# Altium PCB Sensor.PcbDoc (part 2 of 3)
Units mil, origin at the board's own origin, x right, y up, seen from the top; angles counter-clockwise.
Board outline 4000 x 3000 mil, 2 copper layers (Top Layer, Bottom Layer); 1202 components, 71 nets, 2560 pads, 0 vias.
Unrouted connection lines stored in the file: 2489.
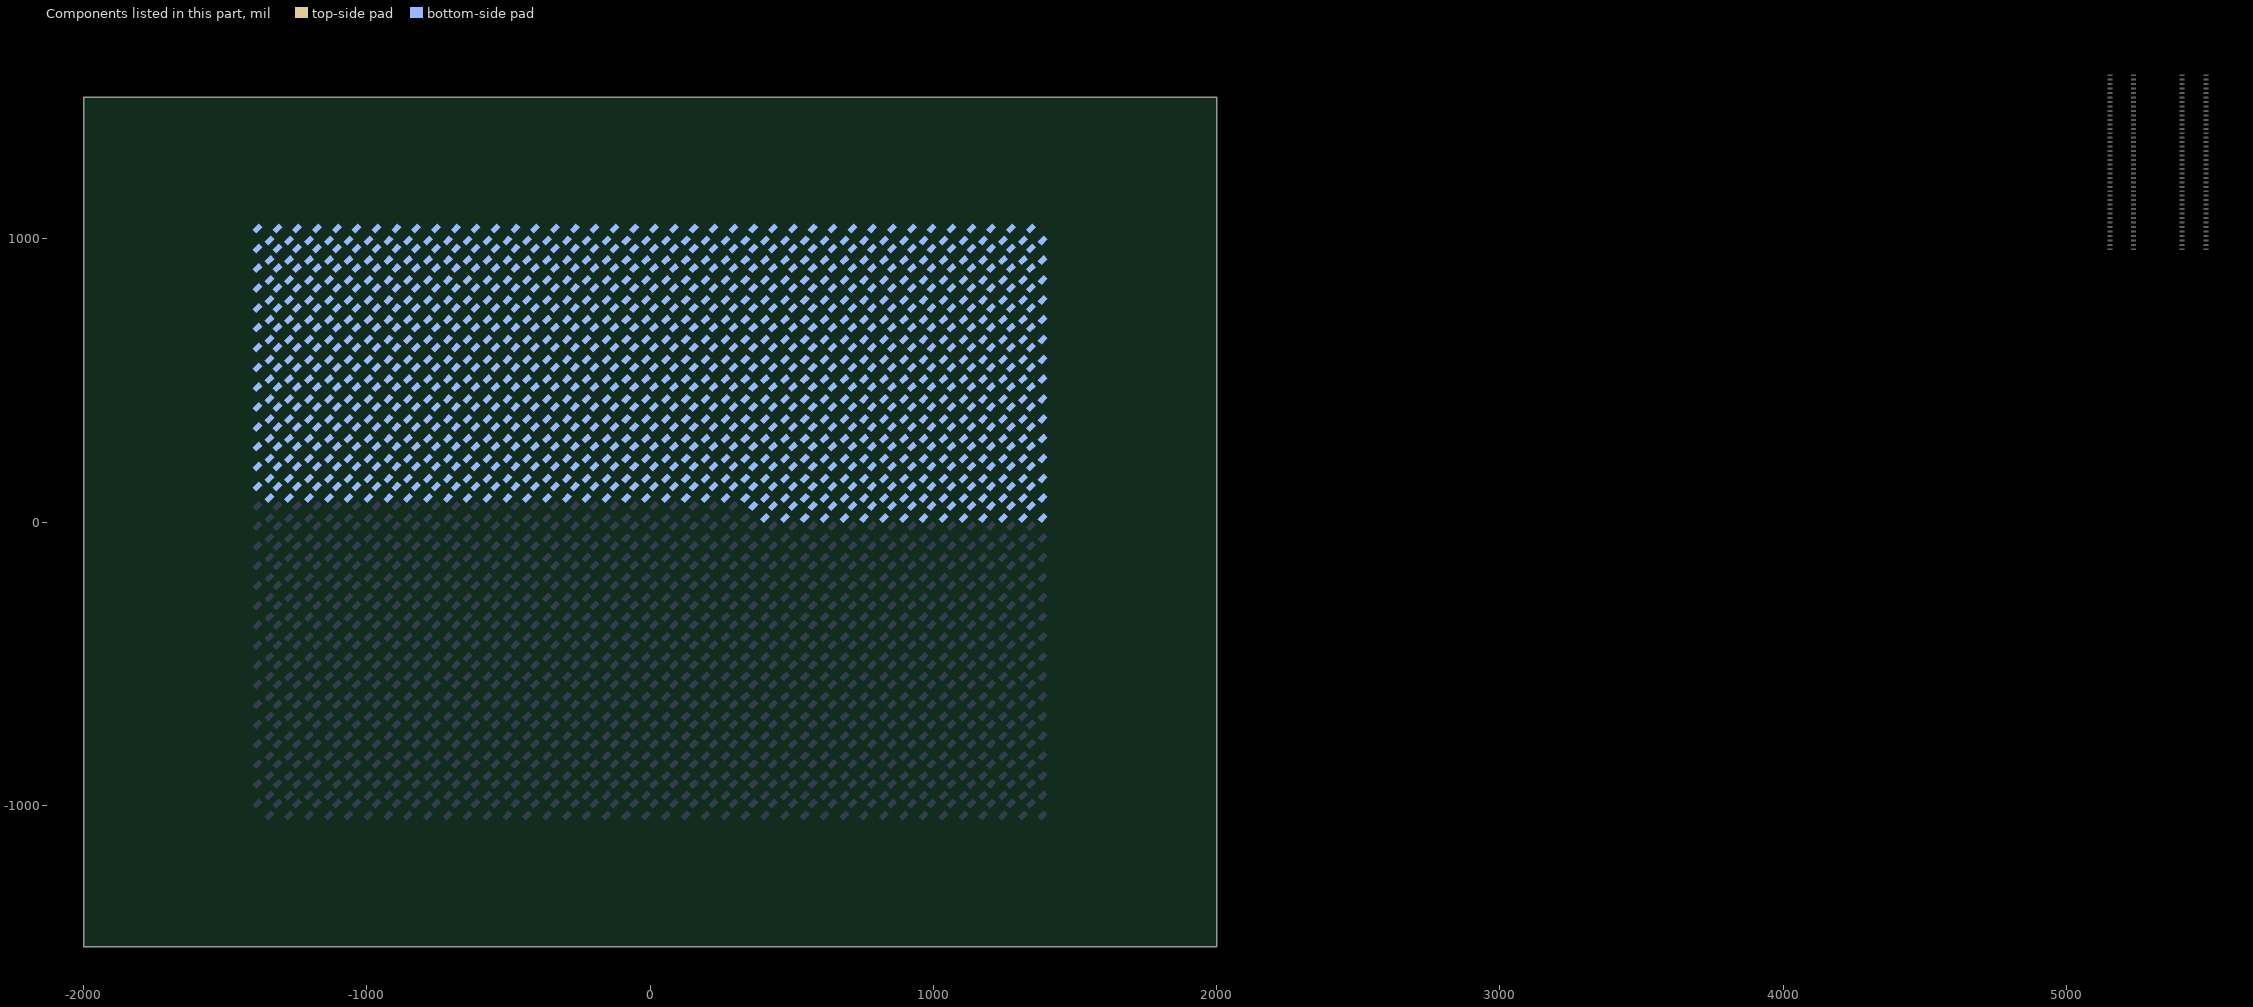
[diagram p2: the components of this part, seen from the top]

## Components (designator, comment, footprint, x,y, rotation, side; value= is the part's Value field where it differs from the comment) (continued)
Q626 "B19H1LS--H9C000114U1930" B19H1LS--H9C000114U1930 385,35 r135 bottom
Q627 "B19H1LS--H9C000114U1930" B19H1LS--H9C000114U1930 455,35 r135 bottom
Q628 "B19H1LS--H9C000114U1930" B19H1LS--H9C000114U1930 525,35 r135 bottom
Q629 "B19H1LS--H9C000114U1930" B19H1LS--H9C000114U1930 595,35 r135 bottom
Q630 "B19H1LS--H9C000114U1930" B19H1LS--H9C000114U1930 665,35 r135 bottom
Q631 "B19H1LS--H9C000114U1930" B19H1LS--H9C000114U1930 735,35 r135 bottom
Q632 "B19H1LS--H9C000114U1930" B19H1LS--H9C000114U1930 805,35 r135 bottom
Q633 "B19H1LS--H9C000114U1930" B19H1LS--H9C000114U1930 875,35 r135 bottom
Q634 "B19H1LS--H9C000114U1930" B19H1LS--H9C000114U1930 945,35 r135 bottom
Q635 "B19H1LS--H9C000114U1930" B19H1LS--H9C000114U1930 1015,35 r135 bottom
Q636 "B19H1LS--H9C000114U1930" B19H1LS--H9C000114U1930 1085,35 r135 bottom
Q637 "B19H1LS--H9C000114U1930" B19H1LS--H9C000114U1930 1155,35 r135 bottom
Q638 "B19H1LS--H9C000114U1930" B19H1LS--H9C000114U1930 1225,35 r135 bottom
Q639 "B19H1LS--H9C000114U1930" B19H1LS--H9C000114U1930 1295,35 r135 bottom
Q640 "B19H1LS--H9C000114U1930" B19H1LS--H9C000114U1930 1365,35 r135 bottom
Q641 "B19H1LS--H9C000114U1930" B19H1LS--H9C000114U1930 -1365,105 r135 bottom
Q642 "B19H1LS--H9C000114U1930" B19H1LS--H9C000114U1930 -1295,105 r135 bottom
Q643 "B19H1LS--H9C000114U1930" B19H1LS--H9C000114U1930 -1225,105 r135 bottom
Q644 "B19H1LS--H9C000114U1930" B19H1LS--H9C000114U1930 -1155,105 r135 bottom
Q645 "B19H1LS--H9C000114U1930" B19H1LS--H9C000114U1930 -1085,105 r135 bottom
Q646 "B19H1LS--H9C000114U1930" B19H1LS--H9C000114U1930 -1015,105 r135 bottom
Q647 "B19H1LS--H9C000114U1930" B19H1LS--H9C000114U1930 -945,105 r135 bottom
Q648 "B19H1LS--H9C000114U1930" B19H1LS--H9C000114U1930 -875,105 r135 bottom
Q649 "B19H1LS--H9C000114U1930" B19H1LS--H9C000114U1930 -805,105 r135 bottom
Q650 "B19H1LS--H9C000114U1930" B19H1LS--H9C000114U1930 -735,105 r135 bottom
Q651 "B19H1LS--H9C000114U1930" B19H1LS--H9C000114U1930 -665,105 r135 bottom
Q652 "B19H1LS--H9C000114U1930" B19H1LS--H9C000114U1930 -595,105 r135 bottom
Q653 "B19H1LS--H9C000114U1930" B19H1LS--H9C000114U1930 -525,105 r135 bottom
Q654 "B19H1LS--H9C000114U1930" B19H1LS--H9C000114U1930 -455,105 r135 bottom
Q655 "B19H1LS--H9C000114U1930" B19H1LS--H9C000114U1930 -385,105 r135 bottom
Q656 "B19H1LS--H9C000114U1930" B19H1LS--H9C000114U1930 -315,105 r135 bottom
Q657 "B19H1LS--H9C000114U1930" B19H1LS--H9C000114U1930 -245,105 r135 bottom
Q658 "B19H1LS--H9C000114U1930" B19H1LS--H9C000114U1930 -175,105 r135 bottom
Q659 "B19H1LS--H9C000114U1930" B19H1LS--H9C000114U1930 -105,105 r135 bottom
Q660 "B19H1LS--H9C000114U1930" B19H1LS--H9C000114U1930 -35,105 r135 bottom
Q661 "B19H1LS--H9C000114U1930" B19H1LS--H9C000114U1930 35,105 r135 bottom
Q662 "B19H1LS--H9C000114U1930" B19H1LS--H9C000114U1930 105,105 r135 bottom
Q663 "B19H1LS--H9C000114U1930" B19H1LS--H9C000114U1930 175,105 r135 bottom
Q664 "B19H1LS--H9C000114U1930" B19H1LS--H9C000114U1930 245,105 r135 bottom
Q665 "B19H1LS--H9C000114U1930" B19H1LS--H9C000114U1930 315,105 r135 bottom
Q666 "B19H1LS--H9C000114U1930" B19H1LS--H9C000114U1930 385,105 r135 bottom
Q667 "B19H1LS--H9C000114U1930" B19H1LS--H9C000114U1930 455,105 r135 bottom
Q668 "B19H1LS--H9C000114U1930" B19H1LS--H9C000114U1930 525,105 r135 bottom
Q669 "B19H1LS--H9C000114U1930" B19H1LS--H9C000114U1930 595,105 r135 bottom
Q670 "B19H1LS--H9C000114U1930" B19H1LS--H9C000114U1930 665,105 r135 bottom
Q671 "B19H1LS--H9C000114U1930" B19H1LS--H9C000114U1930 735,105 r135 bottom
Q672 "B19H1LS--H9C000114U1930" B19H1LS--H9C000114U1930 805,105 r135 bottom
Q673 "B19H1LS--H9C000114U1930" B19H1LS--H9C000114U1930 875,105 r135 bottom
Q674 "B19H1LS--H9C000114U1930" B19H1LS--H9C000114U1930 945,105 r135 bottom
Q675 "B19H1LS--H9C000114U1930" B19H1LS--H9C000114U1930 1015,105 r135 bottom
Q676 "B19H1LS--H9C000114U1930" B19H1LS--H9C000114U1930 1085,105 r135 bottom
Q677 "B19H1LS--H9C000114U1930" B19H1LS--H9C000114U1930 1155,105 r135 bottom
Q678 "B19H1LS--H9C000114U1930" B19H1LS--H9C000114U1930 1225,105 r135 bottom
Q679 "B19H1LS--H9C000114U1930" B19H1LS--H9C000114U1930 1295,105 r135 bottom
Q680 "B19H1LS--H9C000114U1930" B19H1LS--H9C000114U1930 1365,105 r135 bottom
Q681 "B19H1LS--H9C000114U1930" B19H1LS--H9C000114U1930 -1365,175 r135 bottom
Q682 "B19H1LS--H9C000114U1930" B19H1LS--H9C000114U1930 -1295,175 r135 bottom
Q683 "B19H1LS--H9C000114U1930" B19H1LS--H9C000114U1930 -1225,175 r135 bottom
Q684 "B19H1LS--H9C000114U1930" B19H1LS--H9C000114U1930 -1155,175 r135 bottom
Q685 "B19H1LS--H9C000114U1930" B19H1LS--H9C000114U1930 -1085,175 r135 bottom
Q686 "B19H1LS--H9C000114U1930" B19H1LS--H9C000114U1930 -1015,175 r135 bottom
Q687 "B19H1LS--H9C000114U1930" B19H1LS--H9C000114U1930 -945,175 r135 bottom
Q688 "B19H1LS--H9C000114U1930" B19H1LS--H9C000114U1930 -875,175 r135 bottom
Q689 "B19H1LS--H9C000114U1930" B19H1LS--H9C000114U1930 -805,175 r135 bottom
Q690 "B19H1LS--H9C000114U1930" B19H1LS--H9C000114U1930 -735,175 r135 bottom
Q691 "B19H1LS--H9C000114U1930" B19H1LS--H9C000114U1930 -665,175 r135 bottom
Q692 "B19H1LS--H9C000114U1930" B19H1LS--H9C000114U1930 -595,175 r135 bottom
Q693 "B19H1LS--H9C000114U1930" B19H1LS--H9C000114U1930 -525,175 r135 bottom
Q694 "B19H1LS--H9C000114U1930" B19H1LS--H9C000114U1930 -455,175 r135 bottom
Q695 "B19H1LS--H9C000114U1930" B19H1LS--H9C000114U1930 -385,175 r135 bottom
Q696 "B19H1LS--H9C000114U1930" B19H1LS--H9C000114U1930 -315,175 r135 bottom
Q697 "B19H1LS--H9C000114U1930" B19H1LS--H9C000114U1930 -245,175 r135 bottom
Q698 "B19H1LS--H9C000114U1930" B19H1LS--H9C000114U1930 -175,175 r135 bottom
Q699 "B19H1LS--H9C000114U1930" B19H1LS--H9C000114U1930 -105,175 r135 bottom
Q700 "B19H1LS--H9C000114U1930" B19H1LS--H9C000114U1930 -35,175 r135 bottom
Q701 "B19H1LS--H9C000114U1930" B19H1LS--H9C000114U1930 35,175 r135 bottom
Q702 "B19H1LS--H9C000114U1930" B19H1LS--H9C000114U1930 105,175 r135 bottom
Q703 "B19H1LS--H9C000114U1930" B19H1LS--H9C000114U1930 175,175 r135 bottom
Q704 "B19H1LS--H9C000114U1930" B19H1LS--H9C000114U1930 245,175 r135 bottom
Q705 "B19H1LS--H9C000114U1930" B19H1LS--H9C000114U1930 315,175 r135 bottom
Q706 "B19H1LS--H9C000114U1930" B19H1LS--H9C000114U1930 385,175 r135 bottom
Q707 "B19H1LS--H9C000114U1930" B19H1LS--H9C000114U1930 455,175 r135 bottom
Q708 "B19H1LS--H9C000114U1930" B19H1LS--H9C000114U1930 525,175 r135 bottom
Q709 "B19H1LS--H9C000114U1930" B19H1LS--H9C000114U1930 595,175 r135 bottom
Q710 "B19H1LS--H9C000114U1930" B19H1LS--H9C000114U1930 665,175 r135 bottom
Q711 "B19H1LS--H9C000114U1930" B19H1LS--H9C000114U1930 735,175 r135 bottom
Q712 "B19H1LS--H9C000114U1930" B19H1LS--H9C000114U1930 805,175 r135 bottom
Q713 "B19H1LS--H9C000114U1930" B19H1LS--H9C000114U1930 875,175 r135 bottom
Q714 "B19H1LS--H9C000114U1930" B19H1LS--H9C000114U1930 945,175 r135 bottom
Q715 "B19H1LS--H9C000114U1930" B19H1LS--H9C000114U1930 1015,175 r135 bottom
Q716 "B19H1LS--H9C000114U1930" B19H1LS--H9C000114U1930 1085,175 r135 bottom
Q717 "B19H1LS--H9C000114U1930" B19H1LS--H9C000114U1930 1155,175 r135 bottom
Q718 "B19H1LS--H9C000114U1930" B19H1LS--H9C000114U1930 1225,175 r135 bottom
Q719 "B19H1LS--H9C000114U1930" B19H1LS--H9C000114U1930 1295,175 r135 bottom
Q720 "B19H1LS--H9C000114U1930" B19H1LS--H9C000114U1930 1365,175 r135 bottom
Q721 "B19H1LS--H9C000114U1930" B19H1LS--H9C000114U1930 -1365,245 r135 bottom
Q722 "B19H1LS--H9C000114U1930" B19H1LS--H9C000114U1930 -1295,245 r135 bottom
Q723 "B19H1LS--H9C000114U1930" B19H1LS--H9C000114U1930 -1225,245 r135 bottom
Q724 "B19H1LS--H9C000114U1930" B19H1LS--H9C000114U1930 -1155,245 r135 bottom
Q725 "B19H1LS--H9C000114U1930" B19H1LS--H9C000114U1930 -1085,245 r135 bottom
Q726 "B19H1LS--H9C000114U1930" B19H1LS--H9C000114U1930 -1015,245 r135 bottom
Q727 "B19H1LS--H9C000114U1930" B19H1LS--H9C000114U1930 -945,245 r135 bottom
Q728 "B19H1LS--H9C000114U1930" B19H1LS--H9C000114U1930 -875,245 r135 bottom
Q729 "B19H1LS--H9C000114U1930" B19H1LS--H9C000114U1930 -805,245 r135 bottom
Q730 "B19H1LS--H9C000114U1930" B19H1LS--H9C000114U1930 -735,245 r135 bottom
Q731 "B19H1LS--H9C000114U1930" B19H1LS--H9C000114U1930 -665,245 r135 bottom
Q732 "B19H1LS--H9C000114U1930" B19H1LS--H9C000114U1930 -595,245 r135 bottom
Q733 "B19H1LS--H9C000114U1930" B19H1LS--H9C000114U1930 -525,245 r135 bottom
Q734 "B19H1LS--H9C000114U1930" B19H1LS--H9C000114U1930 -455,245 r135 bottom
Q735 "B19H1LS--H9C000114U1930" B19H1LS--H9C000114U1930 -385,245 r135 bottom
Q736 "B19H1LS--H9C000114U1930" B19H1LS--H9C000114U1930 -315,245 r135 bottom
Q737 "B19H1LS--H9C000114U1930" B19H1LS--H9C000114U1930 -245,245 r135 bottom
Q738 "B19H1LS--H9C000114U1930" B19H1LS--H9C000114U1930 -175,245 r135 bottom
Q739 "B19H1LS--H9C000114U1930" B19H1LS--H9C000114U1930 -105,245 r135 bottom
Q740 "B19H1LS--H9C000114U1930" B19H1LS--H9C000114U1930 -35,245 r135 bottom
Q741 "B19H1LS--H9C000114U1930" B19H1LS--H9C000114U1930 35,245 r135 bottom
Q742 "B19H1LS--H9C000114U1930" B19H1LS--H9C000114U1930 105,245 r135 bottom
Q743 "B19H1LS--H9C000114U1930" B19H1LS--H9C000114U1930 175,245 r135 bottom
Q744 "B19H1LS--H9C000114U1930" B19H1LS--H9C000114U1930 245,245 r135 bottom
Q745 "B19H1LS--H9C000114U1930" B19H1LS--H9C000114U1930 315,245 r135 bottom
Q746 "B19H1LS--H9C000114U1930" B19H1LS--H9C000114U1930 385,245 r135 bottom
Q747 "B19H1LS--H9C000114U1930" B19H1LS--H9C000114U1930 455,245 r135 bottom
Q748 "B19H1LS--H9C000114U1930" B19H1LS--H9C000114U1930 525,245 r135 bottom
Q749 "B19H1LS--H9C000114U1930" B19H1LS--H9C000114U1930 595,245 r135 bottom
Q750 "B19H1LS--H9C000114U1930" B19H1LS--H9C000114U1930 665,245 r135 bottom
Q751 "B19H1LS--H9C000114U1930" B19H1LS--H9C000114U1930 735,245 r135 bottom
Q752 "B19H1LS--H9C000114U1930" B19H1LS--H9C000114U1930 805,245 r135 bottom
Q753 "B19H1LS--H9C000114U1930" B19H1LS--H9C000114U1930 875,245 r135 bottom
Q754 "B19H1LS--H9C000114U1930" B19H1LS--H9C000114U1930 945,245 r135 bottom
Q755 "B19H1LS--H9C000114U1930" B19H1LS--H9C000114U1930 1015,245 r135 bottom
Q756 "B19H1LS--H9C000114U1930" B19H1LS--H9C000114U1930 1085,245 r135 bottom
Q757 "B19H1LS--H9C000114U1930" B19H1LS--H9C000114U1930 1155,245 r135 bottom
Q758 "B19H1LS--H9C000114U1930" B19H1LS--H9C000114U1930 1225,245 r135 bottom
Q759 "B19H1LS--H9C000114U1930" B19H1LS--H9C000114U1930 1295,245 r135 bottom
Q760 "B19H1LS--H9C000114U1930" B19H1LS--H9C000114U1930 1365,245 r135 bottom
Q761 "B19H1LS--H9C000114U1930" B19H1LS--H9C000114U1930 -1365,315 r135 bottom
Q762 "B19H1LS--H9C000114U1930" B19H1LS--H9C000114U1930 -1295,315 r135 bottom
Q763 "B19H1LS--H9C000114U1930" B19H1LS--H9C000114U1930 -1225,315 r135 bottom
Q764 "B19H1LS--H9C000114U1930" B19H1LS--H9C000114U1930 -1155,315 r135 bottom
Q765 "B19H1LS--H9C000114U1930" B19H1LS--H9C000114U1930 -1085,315 r135 bottom
Q766 "B19H1LS--H9C000114U1930" B19H1LS--H9C000114U1930 -1015,315 r135 bottom
Q767 "B19H1LS--H9C000114U1930" B19H1LS--H9C000114U1930 -945,315 r135 bottom
Q768 "B19H1LS--H9C000114U1930" B19H1LS--H9C000114U1930 -875,315 r135 bottom
Q769 "B19H1LS--H9C000114U1930" B19H1LS--H9C000114U1930 -805,315 r135 bottom
Q770 "B19H1LS--H9C000114U1930" B19H1LS--H9C000114U1930 -735,315 r135 bottom
Q771 "B19H1LS--H9C000114U1930" B19H1LS--H9C000114U1930 -665,315 r135 bottom
Q772 "B19H1LS--H9C000114U1930" B19H1LS--H9C000114U1930 -595,315 r135 bottom
Q773 "B19H1LS--H9C000114U1930" B19H1LS--H9C000114U1930 -525,315 r135 bottom
Q774 "B19H1LS--H9C000114U1930" B19H1LS--H9C000114U1930 -455,315 r135 bottom
Q775 "B19H1LS--H9C000114U1930" B19H1LS--H9C000114U1930 -385,315 r135 bottom
Q776 "B19H1LS--H9C000114U1930" B19H1LS--H9C000114U1930 -315,315 r135 bottom
Q777 "B19H1LS--H9C000114U1930" B19H1LS--H9C000114U1930 -245,315 r135 bottom
Q778 "B19H1LS--H9C000114U1930" B19H1LS--H9C000114U1930 -175,315 r135 bottom
Q779 "B19H1LS--H9C000114U1930" B19H1LS--H9C000114U1930 -105,315 r135 bottom
Q780 "B19H1LS--H9C000114U1930" B19H1LS--H9C000114U1930 -35,315 r135 bottom
Q781 "B19H1LS--H9C000114U1930" B19H1LS--H9C000114U1930 35,315 r135 bottom
Q782 "B19H1LS--H9C000114U1930" B19H1LS--H9C000114U1930 105,315 r135 bottom
Q783 "B19H1LS--H9C000114U1930" B19H1LS--H9C000114U1930 175,315 r135 bottom
Q784 "B19H1LS--H9C000114U1930" B19H1LS--H9C000114U1930 245,315 r135 bottom
Q785 "B19H1LS--H9C000114U1930" B19H1LS--H9C000114U1930 315,315 r135 bottom
Q786 "B19H1LS--H9C000114U1930" B19H1LS--H9C000114U1930 385,315 r135 bottom
Q787 "B19H1LS--H9C000114U1930" B19H1LS--H9C000114U1930 455,315 r135 bottom
Q788 "B19H1LS--H9C000114U1930" B19H1LS--H9C000114U1930 525,315 r135 bottom
Q789 "B19H1LS--H9C000114U1930" B19H1LS--H9C000114U1930 595,315 r135 bottom
Q790 "B19H1LS--H9C000114U1930" B19H1LS--H9C000114U1930 665,315 r135 bottom
Q791 "B19H1LS--H9C000114U1930" B19H1LS--H9C000114U1930 735,315 r135 bottom
Q792 "B19H1LS--H9C000114U1930" B19H1LS--H9C000114U1930 805,315 r135 bottom
Q793 "B19H1LS--H9C000114U1930" B19H1LS--H9C000114U1930 875,315 r135 bottom
Q794 "B19H1LS--H9C000114U1930" B19H1LS--H9C000114U1930 945,315 r135 bottom
Q795 "B19H1LS--H9C000114U1930" B19H1LS--H9C000114U1930 1015,315 r135 bottom
Q796 "B19H1LS--H9C000114U1930" B19H1LS--H9C000114U1930 1085,315 r135 bottom
Q797 "B19H1LS--H9C000114U1930" B19H1LS--H9C000114U1930 1155,315 r135 bottom
Q798 "B19H1LS--H9C000114U1930" B19H1LS--H9C000114U1930 1225,315 r135 bottom
Q799 "B19H1LS--H9C000114U1930" B19H1LS--H9C000114U1930 1295,315 r135 bottom
Q800 "B19H1LS--H9C000114U1930" B19H1LS--H9C000114U1930 1365,315 r135 bottom
Q801 "B19H1LS--H9C000114U1930" B19H1LS--H9C000114U1930 -1365,385 r135 bottom
Q802 "B19H1LS--H9C000114U1930" B19H1LS--H9C000114U1930 -1295,385 r135 bottom
Q803 "B19H1LS--H9C000114U1930" B19H1LS--H9C000114U1930 -1225,385 r135 bottom
Q804 "B19H1LS--H9C000114U1930" B19H1LS--H9C000114U1930 -1155,385 r135 bottom
Q805 "B19H1LS--H9C000114U1930" B19H1LS--H9C000114U1930 -1085,385 r135 bottom
Q806 "B19H1LS--H9C000114U1930" B19H1LS--H9C000114U1930 -1015,385 r135 bottom
Q807 "B19H1LS--H9C000114U1930" B19H1LS--H9C000114U1930 -945,385 r135 bottom
Q808 "B19H1LS--H9C000114U1930" B19H1LS--H9C000114U1930 -875,385 r135 bottom
Q809 "B19H1LS--H9C000114U1930" B19H1LS--H9C000114U1930 -805,385 r135 bottom
Q810 "B19H1LS--H9C000114U1930" B19H1LS--H9C000114U1930 -735,385 r135 bottom
Q811 "B19H1LS--H9C000114U1930" B19H1LS--H9C000114U1930 -665,385 r135 bottom
Q812 "B19H1LS--H9C000114U1930" B19H1LS--H9C000114U1930 -595,385 r135 bottom
Q813 "B19H1LS--H9C000114U1930" B19H1LS--H9C000114U1930 -525,385 r135 bottom
Q814 "B19H1LS--H9C000114U1930" B19H1LS--H9C000114U1930 -455,385 r135 bottom
Q815 "B19H1LS--H9C000114U1930" B19H1LS--H9C000114U1930 -385,385 r135 bottom
Q816 "B19H1LS--H9C000114U1930" B19H1LS--H9C000114U1930 -315,385 r135 bottom
Q817 "B19H1LS--H9C000114U1930" B19H1LS--H9C000114U1930 -245,385 r135 bottom
Q818 "B19H1LS--H9C000114U1930" B19H1LS--H9C000114U1930 -175,385 r135 bottom
Q819 "B19H1LS--H9C000114U1930" B19H1LS--H9C000114U1930 -105,385 r135 bottom
Q820 "B19H1LS--H9C000114U1930" B19H1LS--H9C000114U1930 -35,385 r135 bottom
Q821 "B19H1LS--H9C000114U1930" B19H1LS--H9C000114U1930 35,385 r135 bottom
Q822 "B19H1LS--H9C000114U1930" B19H1LS--H9C000114U1930 105,385 r135 bottom
Q823 "B19H1LS--H9C000114U1930" B19H1LS--H9C000114U1930 175,385 r135 bottom
Q824 "B19H1LS--H9C000114U1930" B19H1LS--H9C000114U1930 245,385 r135 bottom
Q825 "B19H1LS--H9C000114U1930" B19H1LS--H9C000114U1930 315,385 r135 bottom
Q826 "B19H1LS--H9C000114U1930" B19H1LS--H9C000114U1930 385,385 r135 bottom
Q827 "B19H1LS--H9C000114U1930" B19H1LS--H9C000114U1930 455,385 r135 bottom
Q828 "B19H1LS--H9C000114U1930" B19H1LS--H9C000114U1930 525,385 r135 bottom
Q829 "B19H1LS--H9C000114U1930" B19H1LS--H9C000114U1930 595,385 r135 bottom
Q830 "B19H1LS--H9C000114U1930" B19H1LS--H9C000114U1930 665,385 r135 bottom
Q831 "B19H1LS--H9C000114U1930" B19H1LS--H9C000114U1930 735,385 r135 bottom
Q832 "B19H1LS--H9C000114U1930" B19H1LS--H9C000114U1930 805,385 r135 bottom
Q833 "B19H1LS--H9C000114U1930" B19H1LS--H9C000114U1930 875,385 r135 bottom
Q834 "B19H1LS--H9C000114U1930" B19H1LS--H9C000114U1930 945,385 r135 bottom
Q835 "B19H1LS--H9C000114U1930" B19H1LS--H9C000114U1930 1015,385 r135 bottom
Q836 "B19H1LS--H9C000114U1930" B19H1LS--H9C000114U1930 1085,385 r135 bottom
Q837 "B19H1LS--H9C000114U1930" B19H1LS--H9C000114U1930 1155,385 r135 bottom
Q838 "B19H1LS--H9C000114U1930" B19H1LS--H9C000114U1930 1225,385 r135 bottom
Q839 "B19H1LS--H9C000114U1930" B19H1LS--H9C000114U1930 1295,385 r135 bottom
Q840 "B19H1LS--H9C000114U1930" B19H1LS--H9C000114U1930 1365,385 r135 bottom
Q841 "B19H1LS--H9C000114U1930" B19H1LS--H9C000114U1930 -1365,455 r135 bottom
Q842 "B19H1LS--H9C000114U1930" B19H1LS--H9C000114U1930 -1295,455 r135 bottom
Q843 "B19H1LS--H9C000114U1930" B19H1LS--H9C000114U1930 -1225,455 r135 bottom
Q844 "B19H1LS--H9C000114U1930" B19H1LS--H9C000114U1930 -1155,455 r135 bottom
Q845 "B19H1LS--H9C000114U1930" B19H1LS--H9C000114U1930 -1085,455 r135 bottom
Q846 "B19H1LS--H9C000114U1930" B19H1LS--H9C000114U1930 -1015,455 r135 bottom
Q847 "B19H1LS--H9C000114U1930" B19H1LS--H9C000114U1930 -945,455 r135 bottom
Q848 "B19H1LS--H9C000114U1930" B19H1LS--H9C000114U1930 -875,455 r135 bottom
Q849 "B19H1LS--H9C000114U1930" B19H1LS--H9C000114U1930 -805,455 r135 bottom
Q850 "B19H1LS--H9C000114U1930" B19H1LS--H9C000114U1930 -735,455 r135 bottom
Q851 "B19H1LS--H9C000114U1930" B19H1LS--H9C000114U1930 -665,455 r135 bottom
Q852 "B19H1LS--H9C000114U1930" B19H1LS--H9C000114U1930 -595,455 r135 bottom
Q853 "B19H1LS--H9C000114U1930" B19H1LS--H9C000114U1930 -525,455 r135 bottom
Q854 "B19H1LS--H9C000114U1930" B19H1LS--H9C000114U1930 -455,455 r135 bottom
Q855 "B19H1LS--H9C000114U1930" B19H1LS--H9C000114U1930 -385,455 r135 bottom
Q856 "B19H1LS--H9C000114U1930" B19H1LS--H9C000114U1930 -315,455 r135 bottom
Q857 "B19H1LS--H9C000114U1930" B19H1LS--H9C000114U1930 -245,455 r135 bottom
Q858 "B19H1LS--H9C000114U1930" B19H1LS--H9C000114U1930 -175,455 r135 bottom
Q859 "B19H1LS--H9C000114U1930" B19H1LS--H9C000114U1930 -105,455 r135 bottom
Q860 "B19H1LS--H9C000114U1930" B19H1LS--H9C000114U1930 -35,455 r135 bottom
Q861 "B19H1LS--H9C000114U1930" B19H1LS--H9C000114U1930 35,455 r135 bottom
Q862 "B19H1LS--H9C000114U1930" B19H1LS--H9C000114U1930 105,455 r135 bottom
Q863 "B19H1LS--H9C000114U1930" B19H1LS--H9C000114U1930 175,455 r135 bottom
Q864 "B19H1LS--H9C000114U1930" B19H1LS--H9C000114U1930 245,455 r135 bottom
Q865 "B19H1LS--H9C000114U1930" B19H1LS--H9C000114U1930 315,455 r135 bottom
Q866 "B19H1LS--H9C000114U1930" B19H1LS--H9C000114U1930 385,455 r135 bottom
Q867 "B19H1LS--H9C000114U1930" B19H1LS--H9C000114U1930 455,455 r135 bottom
Q868 "B19H1LS--H9C000114U1930" B19H1LS--H9C000114U1930 525,455 r135 bottom
Q869 "B19H1LS--H9C000114U1930" B19H1LS--H9C000114U1930 595,455 r135 bottom
Q870 "B19H1LS--H9C000114U1930" B19H1LS--H9C000114U1930 665,455 r135 bottom
Q871 "B19H1LS--H9C000114U1930" B19H1LS--H9C000114U1930 735,455 r135 bottom
Q872 "B19H1LS--H9C000114U1930" B19H1LS--H9C000114U1930 805,455 r135 bottom
Q873 "B19H1LS--H9C000114U1930" B19H1LS--H9C000114U1930 875,455 r135 bottom
Q874 "B19H1LS--H9C000114U1930" B19H1LS--H9C000114U1930 945,455 r135 bottom
Q875 "B19H1LS--H9C000114U1930" B19H1LS--H9C000114U1930 1015,455 r135 bottom
Q876 "B19H1LS--H9C000114U1930" B19H1LS--H9C000114U1930 1085,455 r135 bottom
Q877 "B19H1LS--H9C000114U1930" B19H1LS--H9C000114U1930 1155,455 r135 bottom
Q878 "B19H1LS--H9C000114U1930" B19H1LS--H9C000114U1930 1225,455 r135 bottom
Q879 "B19H1LS--H9C000114U1930" B19H1LS--H9C000114U1930 1295,455 r135 bottom
Q880 "B19H1LS--H9C000114U1930" B19H1LS--H9C000114U1930 1365,455 r135 bottom
Q881 "B19H1LS--H9C000114U1930" B19H1LS--H9C000114U1930 -1365,525 r135 bottom
Q882 "B19H1LS--H9C000114U1930" B19H1LS--H9C000114U1930 -1295,525 r135 bottom
Q883 "B19H1LS--H9C000114U1930" B19H1LS--H9C000114U1930 -1225,525 r135 bottom
Q884 "B19H1LS--H9C000114U1930" B19H1LS--H9C000114U1930 -1155,525 r135 bottom
Q885 "B19H1LS--H9C000114U1930" B19H1LS--H9C000114U1930 -1085,525 r135 bottom
Q886 "B19H1LS--H9C000114U1930" B19H1LS--H9C000114U1930 -1015,525 r135 bottom
Q887 "B19H1LS--H9C000114U1930" B19H1LS--H9C000114U1930 -945,525 r135 bottom
Q888 "B19H1LS--H9C000114U1930" B19H1LS--H9C000114U1930 -875,525 r135 bottom
Q889 "B19H1LS--H9C000114U1930" B19H1LS--H9C000114U1930 -805,525 r135 bottom
Q890 "B19H1LS--H9C000114U1930" B19H1LS--H9C000114U1930 -735,525 r135 bottom
Q891 "B19H1LS--H9C000114U1930" B19H1LS--H9C000114U1930 -665,525 r135 bottom
Q892 "B19H1LS--H9C000114U1930" B19H1LS--H9C000114U1930 -595,525 r135 bottom
Q893 "B19H1LS--H9C000114U1930" B19H1LS--H9C000114U1930 -525,525 r135 bottom
Q894 "B19H1LS--H9C000114U1930" B19H1LS--H9C000114U1930 -455,525 r135 bottom
Q895 "B19H1LS--H9C000114U1930" B19H1LS--H9C000114U1930 -385,525 r135 bottom
Q896 "B19H1LS--H9C000114U1930" B19H1LS--H9C000114U1930 -315,525 r135 bottom
Q897 "B19H1LS--H9C000114U1930" B19H1LS--H9C000114U1930 -245,525 r135 bottom
Q898 "B19H1LS--H9C000114U1930" B19H1LS--H9C000114U1930 -175,525 r135 bottom
Q899 "B19H1LS--H9C000114U1930" B19H1LS--H9C000114U1930 -105,525 r135 bottom
Q900 "B19H1LS--H9C000114U1930" B19H1LS--H9C000114U1930 -35,525 r135 bottom
Q901 "B19H1LS--H9C000114U1930" B19H1LS--H9C000114U1930 35,525 r135 bottom
Q902 "B19H1LS--H9C000114U1930" B19H1LS--H9C000114U1930 105,525 r135 bottom
Q903 "B19H1LS--H9C000114U1930" B19H1LS--H9C000114U1930 175,525 r135 bottom
Q904 "B19H1LS--H9C000114U1930" B19H1LS--H9C000114U1930 245,525 r135 bottom
Q905 "B19H1LS--H9C000114U1930" B19H1LS--H9C000114U1930 315,525 r135 bottom
Q906 "B19H1LS--H9C000114U1930" B19H1LS--H9C000114U1930 385,525 r135 bottom
Q907 "B19H1LS--H9C000114U1930" B19H1LS--H9C000114U1930 455,525 r135 bottom
Q908 "B19H1LS--H9C000114U1930" B19H1LS--H9C000114U1930 525,525 r135 bottom
Q909 "B19H1LS--H9C000114U1930" B19H1LS--H9C000114U1930 595,525 r135 bottom
Q910 "B19H1LS--H9C000114U1930" B19H1LS--H9C000114U1930 665,525 r135 bottom
Q911 "B19H1LS--H9C000114U1930" B19H1LS--H9C000114U1930 735,525 r135 bottom
Q912 "B19H1LS--H9C000114U1930" B19H1LS--H9C000114U1930 805,525 r135 bottom
Q913 "B19H1LS--H9C000114U1930" B19H1LS--H9C000114U1930 875,525 r135 bottom
Q914 "B19H1LS--H9C000114U1930" B19H1LS--H9C000114U1930 945,525 r135 bottom
Q915 "B19H1LS--H9C000114U1930" B19H1LS--H9C000114U1930 1015,525 r135 bottom
Q916 "B19H1LS--H9C000114U1930" B19H1LS--H9C000114U1930 1085,525 r135 bottom
Q917 "B19H1LS--H9C000114U1930" B19H1LS--H9C000114U1930 1155,525 r135 bottom
Q918 "B19H1LS--H9C000114U1930" B19H1LS--H9C000114U1930 1225,525 r135 bottom
Q919 "B19H1LS--H9C000114U1930" B19H1LS--H9C000114U1930 1295,525 r135 bottom
Q920 "B19H1LS--H9C000114U1930" B19H1LS--H9C000114U1930 1365,525 r135 bottom
Q921 "B19H1LS--H9C000114U1930" B19H1LS--H9C000114U1930 -1365,595 r135 bottom
Q922 "B19H1LS--H9C000114U1930" B19H1LS--H9C000114U1930 -1295,595 r135 bottom
Q923 "B19H1LS--H9C000114U1930" B19H1LS--H9C000114U1930 -1225,595 r135 bottom
Q924 "B19H1LS--H9C000114U1930" B19H1LS--H9C000114U1930 -1155,595 r135 bottom
Q925 "B19H1LS--H9C000114U1930" B19H1LS--H9C000114U1930 -1085,595 r135 bottom
Q926 "B19H1LS--H9C000114U1930" B19H1LS--H9C000114U1930 -1015,595 r135 bottom
Q927 "B19H1LS--H9C000114U1930" B19H1LS--H9C000114U1930 -945,595 r135 bottom
Q928 "B19H1LS--H9C000114U1930" B19H1LS--H9C000114U1930 -875,595 r135 bottom
Q929 "B19H1LS--H9C000114U1930" B19H1LS--H9C000114U1930 -805,595 r135 bottom
Q930 "B19H1LS--H9C000114U1930" B19H1LS--H9C000114U1930 -735,595 r135 bottom
Q931 "B19H1LS--H9C000114U1930" B19H1LS--H9C000114U1930 -665,595 r135 bottom
Q932 "B19H1LS--H9C000114U1930" B19H1LS--H9C000114U1930 -595,595 r135 bottom
Q933 "B19H1LS--H9C000114U1930" B19H1LS--H9C000114U1930 -525,595 r135 bottom
Q934 "B19H1LS--H9C000114U1930" B19H1LS--H9C000114U1930 -455,595 r135 bottom
Q935 "B19H1LS--H9C000114U1930" B19H1LS--H9C000114U1930 -385,595 r135 bottom
Q936 "B19H1LS--H9C000114U1930" B19H1LS--H9C000114U1930 -315,595 r135 bottom
Q937 "B19H1LS--H9C000114U1930" B19H1LS--H9C000114U1930 -245,595 r135 bottom
Q938 "B19H1LS--H9C000114U1930" B19H1LS--H9C000114U1930 -175,595 r135 bottom
Q939 "B19H1LS--H9C000114U1930" B19H1LS--H9C000114U1930 -105,595 r135 bottom
Q940 "B19H1LS--H9C000114U1930" B19H1LS--H9C000114U1930 -35,595 r135 bottom
Q941 "B19H1LS--H9C000114U1930" B19H1LS--H9C000114U1930 35,595 r135 bottom
Q942 "B19H1LS--H9C000114U1930" B19H1LS--H9C000114U1930 105,595 r135 bottom
Q943 "B19H1LS--H9C000114U1930" B19H1LS--H9C000114U1930 175,595 r135 bottom
Q944 "B19H1LS--H9C000114U1930" B19H1LS--H9C000114U1930 245,595 r135 bottom
Q945 "B19H1LS--H9C000114U1930" B19H1LS--H9C000114U1930 315,595 r135 bottom
Q946 "B19H1LS--H9C000114U1930" B19H1LS--H9C000114U1930 385,595 r135 bottom
Q947 "B19H1LS--H9C000114U1930" B19H1LS--H9C000114U1930 455,595 r135 bottom
Q948 "B19H1LS--H9C000114U1930" B19H1LS--H9C000114U1930 525,595 r135 bottom
Q949 "B19H1LS--H9C000114U1930" B19H1LS--H9C000114U1930 595,595 r135 bottom
Q950 "B19H1LS--H9C000114U1930" B19H1LS--H9C000114U1930 665,595 r135 bottom
Q951 "B19H1LS--H9C000114U1930" B19H1LS--H9C000114U1930 735,595 r135 bottom
Q952 "B19H1LS--H9C000114U1930" B19H1LS--H9C000114U1930 805,595 r135 bottom
Q953 "B19H1LS--H9C000114U1930" B19H1LS--H9C000114U1930 875,595 r135 bottom
Q954 "B19H1LS--H9C000114U1930" B19H1LS--H9C000114U1930 945,595 r135 bottom
Q955 "B19H1LS--H9C000114U1930" B19H1LS--H9C000114U1930 1015,595 r135 bottom
Q956 "B19H1LS--H9C000114U1930" B19H1LS--H9C000114U1930 1085,595 r135 bottom
Q957 "B19H1LS--H9C000114U1930" B19H1LS--H9C000114U1930 1155,595 r135 bottom
Q958 "B19H1LS--H9C000114U1930" B19H1LS--H9C000114U1930 1225,595 r135 bottom
Q959 "B19H1LS--H9C000114U1930" B19H1LS--H9C000114U1930 1295,595 r135 bottom
Q960 "B19H1LS--H9C000114U1930" B19H1LS--H9C000114U1930 1365,595 r135 bottom
Q961 "B19H1LS--H9C000114U1930" B19H1LS--H9C000114U1930 -1365,665 r135 bottom
Q962 "B19H1LS--H9C000114U1930" B19H1LS--H9C000114U1930 -1295,665 r135 bottom
Q963 "B19H1LS--H9C000114U1930" B19H1LS--H9C000114U1930 -1225,665 r135 bottom
Q964 "B19H1LS--H9C000114U1930" B19H1LS--H9C000114U1930 -1155,665 r135 bottom
Q965 "B19H1LS--H9C000114U1930" B19H1LS--H9C000114U1930 -1085,665 r135 bottom
Q966 "B19H1LS--H9C000114U1930" B19H1LS--H9C000114U1930 -1015,665 r135 bottom
Q967 "B19H1LS--H9C000114U1930" B19H1LS--H9C000114U1930 -945,665 r135 bottom
Q968 "B19H1LS--H9C000114U1930" B19H1LS--H9C000114U1930 -875,665 r135 bottom
Q969 "B19H1LS--H9C000114U1930" B19H1LS--H9C000114U1930 -805,665 r135 bottom
Q970 "B19H1LS--H9C000114U1930" B19H1LS--H9C000114U1930 -735,665 r135 bottom
Q971 "B19H1LS--H9C000114U1930" B19H1LS--H9C000114U1930 -665,665 r135 bottom
Q972 "B19H1LS--H9C000114U1930" B19H1LS--H9C000114U1930 -595,665 r135 bottom
Q973 "B19H1LS--H9C000114U1930" B19H1LS--H9C000114U1930 -525,665 r135 bottom
Q974 "B19H1LS--H9C000114U1930" B19H1LS--H9C000114U1930 -455,665 r135 bottom
Q975 "B19H1LS--H9C000114U1930" B19H1LS--H9C000114U1930 -385,665 r135 bottom
Q976 "B19H1LS--H9C000114U1930" B19H1LS--H9C000114U1930 -315,665 r135 bottom
Q977 "B19H1LS--H9C000114U1930" B19H1LS--H9C000114U1930 -245,665 r135 bottom
Q978 "B19H1LS--H9C000114U1930" B19H1LS--H9C000114U1930 -175,665 r135 bottom
Q979 "B19H1LS--H9C000114U1930" B19H1LS--H9C000114U1930 -105,665 r135 bottom
Q980 "B19H1LS--H9C000114U1930" B19H1LS--H9C000114U1930 -35,665 r135 bottom
Q981 "B19H1LS--H9C000114U1930" B19H1LS--H9C000114U1930 35,665 r135 bottom
Q982 "B19H1LS--H9C000114U1930" B19H1LS--H9C000114U1930 105,665 r135 bottom
Q983 "B19H1LS--H9C000114U1930" B19H1LS--H9C000114U1930 175,665 r135 bottom
Q984 "B19H1LS--H9C000114U1930" B19H1LS--H9C000114U1930 245,665 r135 bottom
Q985 "B19H1LS--H9C000114U1930" B19H1LS--H9C000114U1930 315,665 r135 bottom
Q986 "B19H1LS--H9C000114U1930" B19H1LS--H9C000114U1930 385,665 r135 bottom
Q987 "B19H1LS--H9C000114U1930" B19H1LS--H9C000114U1930 455,665 r135 bottom
Q988 "B19H1LS--H9C000114U1930" B19H1LS--H9C000114U1930 525,665 r135 bottom
Q989 "B19H1LS--H9C000114U1930" B19H1LS--H9C000114U1930 595,665 r135 bottom
Q990 "B19H1LS--H9C000114U1930" B19H1LS--H9C000114U1930 665,665 r135 bottom
Q991 "B19H1LS--H9C000114U1930" B19H1LS--H9C000114U1930 735,665 r135 bottom
Q992 "B19H1LS--H9C000114U1930" B19H1LS--H9C000114U1930 805,665 r135 bottom
Q993 "B19H1LS--H9C000114U1930" B19H1LS--H9C000114U1930 875,665 r135 bottom
Q994 "B19H1LS--H9C000114U1930" B19H1LS--H9C000114U1930 945,665 r135 bottom
Q995 "B19H1LS--H9C000114U1930" B19H1LS--H9C000114U1930 1015,665 r135 bottom
Q996 "B19H1LS--H9C000114U1930" B19H1LS--H9C000114U1930 1085,665 r135 bottom
Q997 "B19H1LS--H9C000114U1930" B19H1LS--H9C000114U1930 1155,665 r135 bottom
Q998 "B19H1LS--H9C000114U1930" B19H1LS--H9C000114U1930 1225,665 r135 bottom
Q999 "B19H1LS--H9C000114U1930" B19H1LS--H9C000114U1930 1295,665 r135 bottom
Q1000 "B19H1LS--H9C000114U1930" B19H1LS--H9C000114U1930 1365,665 r135 bottom
Q1001 "B19H1LS--H9C000114U1930" B19H1LS--H9C000114U1930 -1365,735 r135 bottom
Q1002 "B19H1LS--H9C000114U1930" B19H1LS--H9C000114U1930 -1295,735 r135 bottom
Q1003 "B19H1LS--H9C000114U1930" B19H1LS--H9C000114U1930 -1225,735 r135 bottom
Q1004 "B19H1LS--H9C000114U1930" B19H1LS--H9C000114U1930 -1155,735 r135 bottom
Q1005 "B19H1LS--H9C000114U1930" B19H1LS--H9C000114U1930 -1085,735 r135 bottom
Q1006 "B19H1LS--H9C000114U1930" B19H1LS--H9C000114U1930 -1015,735 r135 bottom
Q1007 "B19H1LS--H9C000114U1930" B19H1LS--H9C000114U1930 -945,735 r135 bottom
Q1008 "B19H1LS--H9C000114U1930" B19H1LS--H9C000114U1930 -875,735 r135 bottom
Q1009 "B19H1LS--H9C000114U1930" B19H1LS--H9C000114U1930 -805,735 r135 bottom
Q1010 "B19H1LS--H9C000114U1930" B19H1LS--H9C000114U1930 -735,735 r135 bottom
Q1011 "B19H1LS--H9C000114U1930" B19H1LS--H9C000114U1930 -665,735 r135 bottom
Q1012 "B19H1LS--H9C000114U1930" B19H1LS--H9C000114U1930 -595,735 r135 bottom
Q1013 "B19H1LS--H9C000114U1930" B19H1LS--H9C000114U1930 -525,735 r135 bottom
Q1014 "B19H1LS--H9C000114U1930" B19H1LS--H9C000114U1930 -455,735 r135 bottom
Q1015 "B19H1LS--H9C000114U1930" B19H1LS--H9C000114U1930 -385,735 r135 bottom
Q1016 "B19H1LS--H9C000114U1930" B19H1LS--H9C000114U1930 -315,735 r135 bottom
Q1017 "B19H1LS--H9C000114U1930" B19H1LS--H9C000114U1930 -245,735 r135 bottom
Q1018 "B19H1LS--H9C000114U1930" B19H1LS--H9C000114U1930 -175,735 r135 bottom
Q1019 "B19H1LS--H9C000114U1930" B19H1LS--H9C000114U1930 -105,735 r135 bottom
Q1020 "B19H1LS--H9C000114U1930" B19H1LS--H9C000114U1930 -35,735 r135 bottom
Q1021 "B19H1LS--H9C000114U1930" B19H1LS--H9C000114U1930 35,735 r135 bottom
Q1022 "B19H1LS--H9C000114U1930" B19H1LS--H9C000114U1930 105,735 r135 bottom
Q1023 "B19H1LS--H9C000114U1930" B19H1LS--H9C000114U1930 175,735 r135 bottom
Q1024 "B19H1LS--H9C000114U1930" B19H1LS--H9C000114U1930 245,735 r135 bottom
Q1025 "B19H1LS--H9C000114U1930" B19H1LS--H9C000114U1930 315,735 r135 bottom
Q1026 "B19H1LS--H9C000114U1930" B19H1LS--H9C000114U1930 385,735 r135 bottom
Q1027 "B19H1LS--H9C000114U1930" B19H1LS--H9C000114U1930 455,735 r135 bottom
Q1028 "B19H1LS--H9C000114U1930" B19H1LS--H9C000114U1930 525,735 r135 bottom
Q1029 "B19H1LS--H9C000114U1930" B19H1LS--H9C000114U1930 595,735 r135 bottom
Q1030 "B19H1LS--H9C000114U1930" B19H1LS--H9C000114U1930 665,735 r135 bottom
Q1031 "B19H1LS--H9C000114U1930" B19H1LS--H9C000114U1930 735,735 r135 bottom
Q1032 "B19H1LS--H9C000114U1930" B19H1LS--H9C000114U1930 805,735 r135 bottom
Q1033 "B19H1LS--H9C000114U1930" B19H1LS--H9C000114U1930 875,735 r135 bottom
Q1034 "B19H1LS--H9C000114U1930" B19H1LS--H9C000114U1930 945,735 r135 bottom
Q1035 "B19H1LS--H9C000114U1930" B19H1LS--H9C000114U1930 1015,735 r135 bottom
Q1036 "B19H1LS--H9C000114U1930" B19H1LS--H9C000114U1930 1085,735 r135 bottom
Q1037 "B19H1LS--H9C000114U1930" B19H1LS--H9C000114U1930 1155,735 r135 bottom
Q1038 "B19H1LS--H9C000114U1930" B19H1LS--H9C000114U1930 1225,735 r135 bottom
Q1039 "B19H1LS--H9C000114U1930" B19H1LS--H9C000114U1930 1295,735 r135 bottom
Q1040 "B19H1LS--H9C000114U1930" B19H1LS--H9C000114U1930 1365,735 r135 bottom
Q1041 "B19H1LS--H9C000114U1930" B19H1LS--H9C000114U1930 -1365,805 r135 bottom
Q1042 "B19H1LS--H9C000114U1930" B19H1LS--H9C000114U1930 -1295,805 r135 bottom
Q1043 "B19H1LS--H9C000114U1930" B19H1LS--H9C000114U1930 -1225,805 r135 bottom
Q1044 "B19H1LS--H9C000114U1930" B19H1LS--H9C000114U1930 -1155,805 r135 bottom
Q1045 "B19H1LS--H9C000114U1930" B19H1LS--H9C000114U1930 -1085,805 r135 bottom
Q1046 "B19H1LS--H9C000114U1930" B19H1LS--H9C000114U1930 -1015,805 r135 bottom
Q1047 "B19H1LS--H9C000114U1930" B19H1LS--H9C000114U1930 -945,805 r135 bottom
Q1048 "B19H1LS--H9C000114U1930" B19H1LS--H9C000114U1930 -875,805 r135 bottom
Q1049 "B19H1LS--H9C000114U1930" B19H1LS--H9C000114U1930 -805,805 r135 bottom
Q1050 "B19H1LS--H9C000114U1930" B19H1LS--H9C000114U1930 -735,805 r135 bottom
Q1051 "B19H1LS--H9C000114U1930" B19H1LS--H9C000114U1930 -665,805 r135 bottom
Q1052 "B19H1LS--H9C000114U1930" B19H1LS--H9C000114U1930 -595,805 r135 bottom
Q1053 "B19H1LS--H9C000114U1930" B19H1LS--H9C000114U1930 -525,805 r135 bottom
Q1054 "B19H1LS--H9C000114U1930" B19H1LS--H9C000114U1930 -455,805 r135 bottom
Q1055 "B19H1LS--H9C000114U1930" B19H1LS--H9C000114U1930 -385,805 r135 bottom
Q1056 "B19H1LS--H9C000114U1930" B19H1LS--H9C000114U1930 -315,805 r135 bottom
Q1057 "B19H1LS--H9C000114U1930" B19H1LS--H9C000114U1930 -245,805 r135 bottom
Q1058 "B19H1LS--H9C000114U1930" B19H1LS--H9C000114U1930 -175,805 r135 bottom
Q1059 "B19H1LS--H9C000114U1930" B19H1LS--H9C000114U1930 -105,805 r135 bottom
Q1060 "B19H1LS--H9C000114U1930" B19H1LS--H9C000114U1930 -35,805 r135 bottom
Q1061 "B19H1LS--H9C000114U1930" B19H1LS--H9C000114U1930 35,805 r135 bottom
Q1062 "B19H1LS--H9C000114U1930" B19H1LS--H9C000114U1930 105,805 r135 bottom
Q1063 "B19H1LS--H9C000114U1930" B19H1LS--H9C000114U1930 175,805 r135 bottom
Q1064 "B19H1LS--H9C000114U1930" B19H1LS--H9C000114U1930 245,805 r135 bottom
Q1065 "B19H1LS--H9C000114U1930" B19H1LS--H9C000114U1930 315,805 r135 bottom
Q1066 "B19H1LS--H9C000114U1930" B19H1LS--H9C000114U1930 385,805 r135 bottom
Q1067 "B19H1LS--H9C000114U1930" B19H1LS--H9C000114U1930 455,805 r135 bottom
Q1068 "B19H1LS--H9C000114U1930" B19H1LS--H9C000114U1930 525,805 r135 bottom
Q1069 "B19H1LS--H9C000114U1930" B19H1LS--H9C000114U1930 595,805 r135 bottom
Q1070 "B19H1LS--H9C000114U1930" B19H1LS--H9C000114U1930 665,805 r135 bottom
Q1071 "B19H1LS--H9C000114U1930" B19H1LS--H9C000114U1930 735,805 r135 bottom
Q1072 "B19H1LS--H9C000114U1930" B19H1LS--H9C000114U1930 805,805 r135 bottom
Q1073 "B19H1LS--H9C000114U1930" B19H1LS--H9C000114U1930 875,805 r135 bottom
Q1074 "B19H1LS--H9C000114U1930" B19H1LS--H9C000114U1930 945,805 r135 bottom
Q1075 "B19H1LS--H9C000114U1930" B19H1LS--H9C000114U1930 1015,805 r135 bottom
Q1076 "B19H1LS--H9C000114U1930" B19H1LS--H9C000114U1930 1085,805 r135 bottom
Q1077 "B19H1LS--H9C000114U1930" B19H1LS--H9C000114U1930 1155,805 r135 bottom
Q1078 "B19H1LS--H9C000114U1930" B19H1LS--H9C000114U1930 1225,805 r135 bottom
Q1079 "B19H1LS--H9C000114U1930" B19H1LS--H9C000114U1930 1295,805 r135 bottom
Q1080 "B19H1LS--H9C000114U1930" B19H1LS--H9C000114U1930 1365,805 r135 bottom
Q1081 "B19H1LS--H9C000114U1930" B19H1LS--H9C000114U1930 -1365,875 r135 bottom
Q1082 "B19H1LS--H9C000114U1930" B19H1LS--H9C000114U1930 -1295,875 r135 bottom
Q1083 "B19H1LS--H9C000114U1930" B19H1LS--H9C000114U1930 -1225,875 r135 bottom
Q1084 "B19H1LS--H9C000114U1930" B19H1LS--H9C000114U1930 -1155,875 r135 bottom
Q1085 "B19H1LS--H9C000114U1930" B19H1LS--H9C000114U1930 -1085,875 r135 bottom
Q1086 "B19H1LS--H9C000114U1930" B19H1LS--H9C000114U1930 -1015,875 r135 bottom
Q1087 "B19H1LS--H9C000114U1930" B19H1LS--H9C000114U1930 -945,875 r135 bottom
Q1088 "B19H1LS--H9C000114U1930" B19H1LS--H9C000114U1930 -875,875 r135 bottom
Q1089 "B19H1LS--H9C000114U1930" B19H1LS--H9C000114U1930 -805,875 r135 bottom
Q1090 "B19H1LS--H9C000114U1930" B19H1LS--H9C000114U1930 -735,875 r135 bottom
Q1091 "B19H1LS--H9C000114U1930" B19H1LS--H9C000114U1930 -665,875 r135 bottom
Q1092 "B19H1LS--H9C000114U1930" B19H1LS--H9C000114U1930 -595,875 r135 bottom
Q1093 "B19H1LS--H9C000114U1930" B19H1LS--H9C000114U1930 -525,875 r135 bottom
Q1094 "B19H1LS--H9C000114U1930" B19H1LS--H9C000114U1930 -455,875 r135 bottom
Q1095 "B19H1LS--H9C000114U1930" B19H1LS--H9C000114U1930 -385,875 r135 bottom
Q1096 "B19H1LS--H9C000114U1930" B19H1LS--H9C000114U1930 -315,875 r135 bottom
Q1097 "B19H1LS--H9C000114U1930" B19H1LS--H9C000114U1930 -245,875 r135 bottom
Q1098 "B19H1LS--H9C000114U1930" B19H1LS--H9C000114U1930 -175,875 r135 bottom
Q1099 "B19H1LS--H9C000114U1930" B19H1LS--H9C000114U1930 -105,875 r135 bottom
Q1100 "B19H1LS--H9C000114U1930" B19H1LS--H9C000114U1930 -35,875 r135 bottom
Q1101 "B19H1LS--H9C000114U1930" B19H1LS--H9C000114U1930 35,875 r135 bottom
Q1102 "B19H1LS--H9C000114U1930" B19H1LS--H9C000114U1930 105,875 r135 bottom
Q1103 "B19H1LS--H9C000114U1930" B19H1LS--H9C000114U1930 175,875 r135 bottom
Q1104 "B19H1LS--H9C000114U1930" B19H1LS--H9C000114U1930 245,875 r135 bottom
Q1105 "B19H1LS--H9C000114U1930" B19H1LS--H9C000114U1930 315,875 r135 bottom
Q1106 "B19H1LS--H9C000114U1930" B19H1LS--H9C000114U1930 385,875 r135 bottom
Q1107 "B19H1LS--H9C000114U1930" B19H1LS--H9C000114U1930 455,875 r135 bottom
Q1108 "B19H1LS--H9C000114U1930" B19H1LS--H9C000114U1930 525,875 r135 bottom
Q1109 "B19H1LS--H9C000114U1930" B19H1LS--H9C000114U1930 595,875 r135 bottom
Q1110 "B19H1LS--H9C000114U1930" B19H1LS--H9C000114U1930 665,875 r135 bottom
Q1111 "B19H1LS--H9C000114U1930" B19H1LS--H9C000114U1930 735,875 r135 bottom
Q1112 "B19H1LS--H9C000114U1930" B19H1LS--H9C000114U1930 805,875 r135 bottom
Q1113 "B19H1LS--H9C000114U1930" B19H1LS--H9C000114U1930 875,875 r135 bottom
Q1114 "B19H1LS--H9C000114U1930" B19H1LS--H9C000114U1930 945,875 r135 bottom
Q1115 "B19H1LS--H9C000114U1930" B19H1LS--H9C000114U1930 1015,875 r135 bottom
Q1116 "B19H1LS--H9C000114U1930" B19H1LS--H9C000114U1930 1085,875 r135 bottom
Q1117 "B19H1LS--H9C000114U1930" B19H1LS--H9C000114U1930 1155,875 r135 bottom
Q1118 "B19H1LS--H9C000114U1930" B19H1LS--H9C000114U1930 1225,875 r135 bottom
Q1119 "B19H1LS--H9C000114U1930" B19H1LS--H9C000114U1930 1295,875 r135 bottom
Q1120 "B19H1LS--H9C000114U1930" B19H1LS--H9C000114U1930 1365,875 r135 bottom
Q1121 "B19H1LS--H9C000114U1930" B19H1LS--H9C000114U1930 -1365,945 r135 bottom
Q1122 "B19H1LS--H9C000114U1930" B19H1LS--H9C000114U1930 -1295,945 r135 bottom
Q1123 "B19H1LS--H9C000114U1930" B19H1LS--H9C000114U1930 -1225,945 r135 bottom
Q1124 "B19H1LS--H9C000114U1930" B19H1LS--H9C000114U1930 -1155,945 r135 bottom
Q1125 "B19H1LS--H9C000114U1930" B19H1LS--H9C000114U1930 -1085,945 r135 bottom
Q1126 "B19H1LS--H9C000114U1930" B19H1LS--H9C000114U1930 -1015,945 r135 bottom
Q1127 "B19H1LS--H9C000114U1930" B19H1LS--H9C000114U1930 -945,945 r135 bottom
Q1128 "B19H1LS--H9C000114U1930" B19H1LS--H9C000114U1930 -875,945 r135 bottom
Q1129 "B19H1LS--H9C000114U1930" B19H1LS--H9C000114U1930 -805,945 r135 bottom
Q1130 "B19H1LS--H9C000114U1930" B19H1LS--H9C000114U1930 -735,945 r135 bottom
Q1131 "B19H1LS--H9C000114U1930" B19H1LS--H9C000114U1930 -665,945 r135 bottom
Q1132 "B19H1LS--H9C000114U1930" B19H1LS--H9C000114U1930 -595,945 r135 bottom
Q1133 "B19H1LS--H9C000114U1930" B19H1LS--H9C000114U1930 -525,945 r135 bottom
Q1134 "B19H1LS--H9C000114U1930" B19H1LS--H9C000114U1930 -455,945 r135 bottom
Q1135 "B19H1LS--H9C000114U1930" B19H1LS--H9C000114U1930 -385,945 r135 bottom
Q1136 "B19H1LS--H9C000114U1930" B19H1LS--H9C000114U1930 -315,945 r135 bottom
Q1137 "B19H1LS--H9C000114U1930" B19H1LS--H9C000114U1930 -245,945 r135 bottom
Q1138 "B19H1LS--H9C000114U1930" B19H1LS--H9C000114U1930 -175,945 r135 bottom
Q1139 "B19H1LS--H9C000114U1930" B19H1LS--H9C000114U1930 -105,945 r135 bottom
Q1140 "B19H1LS--H9C000114U1930" B19H1LS--H9C000114U1930 -35,945 r135 bottom
Q1141 "B19H1LS--H9C000114U1930" B19H1LS--H9C000114U1930 35,945 r135 bottom
Q1142 "B19H1LS--H9C000114U1930" B19H1LS--H9C000114U1930 105,945 r135 bottom
Q1143 "B19H1LS--H9C000114U1930" B19H1LS--H9C000114U1930 175,945 r135 bottom
Q1144 "B19H1LS--H9C000114U1930" B19H1LS--H9C000114U1930 245,945 r135 bottom
Q1145 "B19H1LS--H9C000114U1930" B19H1LS--H9C000114U1930 315,945 r135 bottom
Q1146 "B19H1LS--H9C000114U1930" B19H1LS--H9C000114U1930 385,945 r135 bottom
Q1147 "B19H1LS--H9C000114U1930" B19H1LS--H9C000114U1930 455,945 r135 bottom
Q1148 "B19H1LS--H9C000114U1930" B19H1LS--H9C000114U1930 525,945 r135 bottom
Q1149 "B19H1LS--H9C000114U1930" B19H1LS--H9C000114U1930 595,945 r135 bottom
Q1150 "B19H1LS--H9C000114U1930" B19H1LS--H9C000114U1930 665,945 r135 bottom
Q1151 "B19H1LS--H9C000114U1930" B19H1LS--H9C000114U1930 735,945 r135 bottom
Q1152 "B19H1LS--H9C000114U1930" B19H1LS--H9C000114U1930 805,945 r135 bottom
Q1153 "B19H1LS--H9C000114U1930" B19H1LS--H9C000114U1930 875,945 r135 bottom
Q1154 "B19H1LS--H9C000114U1930" B19H1LS--H9C000114U1930 945,945 r135 bottom
Q1155 "B19H1LS--H9C000114U1930" B19H1LS--H9C000114U1930 1015,945 r135 bottom
Q1156 "B19H1LS--H9C000114U1930" B19H1LS--H9C000114U1930 1085,945 r135 bottom
Q1157 "B19H1LS--H9C000114U1930" B19H1LS--H9C000114U1930 1155,945 r135 bottom
Q1158 "B19H1LS--H9C000114U1930" B19H1LS--H9C000114U1930 1225,945 r135 bottom
Q1159 "B19H1LS--H9C000114U1930" B19H1LS--H9C000114U1930 1295,945 r135 bottom
Q1160 "B19H1LS--H9C000114U1930" B19H1LS--H9C000114U1930 1365,945 r135 bottom
Q1161 "B19H1LS--H9C000114U1930" B19H1LS--H9C000114U1930 -1365,1015 r135 bottom
Q1162 "B19H1LS--H9C000114U1930" B19H1LS--H9C000114U1930 -1295,1015 r135 bottom
Q1163 "B19H1LS--H9C000114U1930" B19H1LS--H9C000114U1930 -1225,1015 r135 bottom
Q1164 "B19H1LS--H9C000114U1930" B19H1LS--H9C000114U1930 -1155,1015 r135 bottom
Q1165 "B19H1LS--H9C000114U1930" B19H1LS--H9C000114U1930 -1085,1015 r135 bottom
Q1166 "B19H1LS--H9C000114U1930" B19H1LS--H9C000114U1930 -1015,1015 r135 bottom
Q1167 "B19H1LS--H9C000114U1930" B19H1LS--H9C000114U1930 -945,1015 r135 bottom
Q1168 "B19H1LS--H9C000114U1930" B19H1LS--H9C000114U1930 -875,1015 r135 bottom
Q1169 "B19H1LS--H9C000114U1930" B19H1LS--H9C000114U1930 -805,1015 r135 bottom
Q1170 "B19H1LS--H9C000114U1930" B19H1LS--H9C000114U1930 -735,1015 r135 bottom
Q1171 "B19H1LS--H9C000114U1930" B19H1LS--H9C000114U1930 -665,1015 r135 bottom
Q1172 "B19H1LS--H9C000114U1930" B19H1LS--H9C000114U1930 -595,1015 r135 bottom
Q1173 "B19H1LS--H9C000114U1930" B19H1LS--H9C000114U1930 -525,1015 r135 bottom
Q1174 "B19H1LS--H9C000114U1930" B19H1LS--H9C000114U1930 -455,1015 r135 bottom
Q1175 "B19H1LS--H9C000114U1930" B19H1LS--H9C000114U1930 -385,1015 r135 bottom
Q1176 "B19H1LS--H9C000114U1930" B19H1LS--H9C000114U1930 -315,1015 r135 bottom
Q1177 "B19H1LS--H9C000114U1930" B19H1LS--H9C000114U1930 -245,1015 r135 bottom
Q1178 "B19H1LS--H9C000114U1930" B19H1LS--H9C000114U1930 -175,1015 r135 bottom
Q1179 "B19H1LS--H9C000114U1930" B19H1LS--H9C000114U1930 -105,1015 r135 bottom
Q1180 "B19H1LS--H9C000114U1930" B19H1LS--H9C000114U1930 -35,1015 r135 bottom
Q1181 "B19H1LS--H9C000114U1930" B19H1LS--H9C000114U1930 35,1015 r135 bottom
Q1182 "B19H1LS--H9C000114U1930" B19H1LS--H9C000114U1930 105,1015 r135 bottom
Q1183 "B19H1LS--H9C000114U1930" B19H1LS--H9C000114U1930 175,1015 r135 bottom
Q1184 "B19H1LS--H9C000114U1930" B19H1LS--H9C000114U1930 245,1015 r135 bottom
Q1185 "B19H1LS--H9C000114U1930" B19H1LS--H9C000114U1930 315,1015 r135 bottom
Q1186 "B19H1LS--H9C000114U1930" B19H1LS--H9C000114U1930 385,1015 r135 bottom
Q1187 "B19H1LS--H9C000114U1930" B19H1LS--H9C000114U1930 455,1015 r135 bottom
Q1188 "B19H1LS--H9C000114U1930" B19H1LS--H9C000114U1930 525,1015 r135 bottom
Q1189 "B19H1LS--H9C000114U1930" B19H1LS--H9C000114U1930 595,1015 r135 bottom
Q1190 "B19H1LS--H9C000114U1930" B19H1LS--H9C000114U1930 665,1015 r135 bottom
Q1191 "B19H1LS--H9C000114U1930" B19H1LS--H9C000114U1930 735,1015 r135 bottom
Q1192 "B19H1LS--H9C000114U1930" B19H1LS--H9C000114U1930 805,1015 r135 bottom
Q1193 "B19H1LS--H9C000114U1930" B19H1LS--H9C000114U1930 875,1015 r135 bottom
Q1194 "B19H1LS--H9C000114U1930" B19H1LS--H9C000114U1930 945,1015 r135 bottom
Q1195 "B19H1LS--H9C000114U1930" B19H1LS--H9C000114U1930 1015,1015 r135 bottom
Q1196 "B19H1LS--H9C000114U1930" B19H1LS--H9C000114U1930 1085,1015 r135 bottom
Q1197 "B19H1LS--H9C000114U1930" B19H1LS--H9C000114U1930 1155,1015 r135 bottom
Q1198 "B19H1LS--H9C000114U1930" B19H1LS--H9C000114U1930 1225,1015 r135 bottom
Q1199 "B19H1LS--H9C000114U1930" B19H1LS--H9C000114U1930 1295,1015 r135 bottom
Q1200 "B19H1LS--H9C000114U1930" B19H1LS--H9C000114U1930 1365,1015 r135 bottom